# EAGLE board UV - SERVO_CTRL - Copy (3) (EAGLE 6.3)
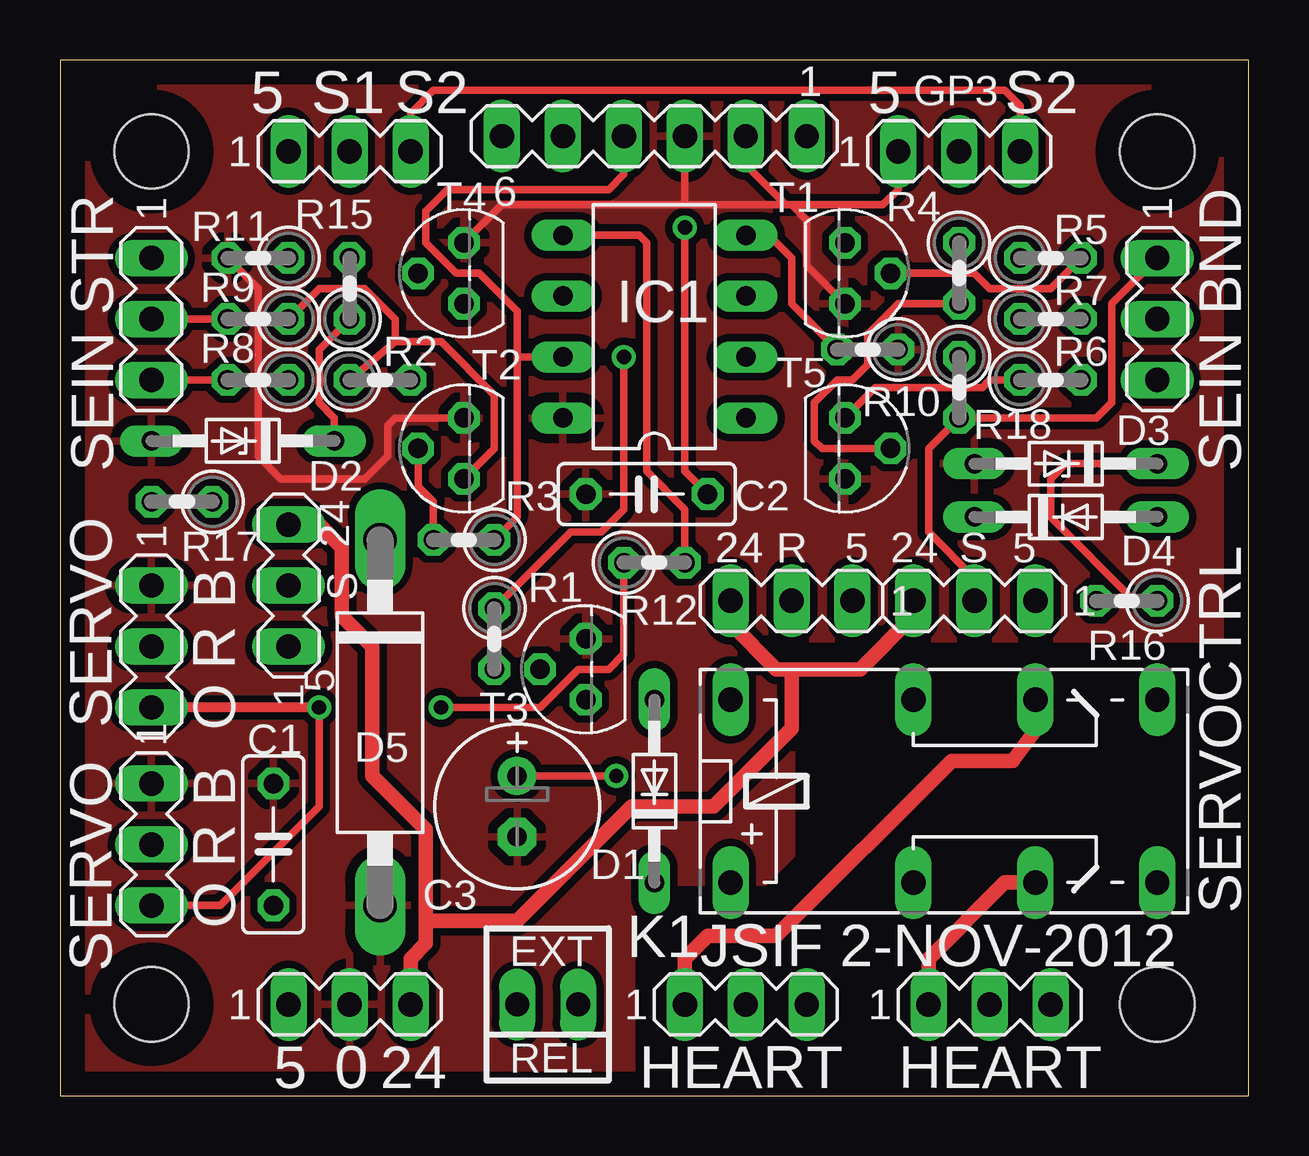
[diagram p0: board, top side]
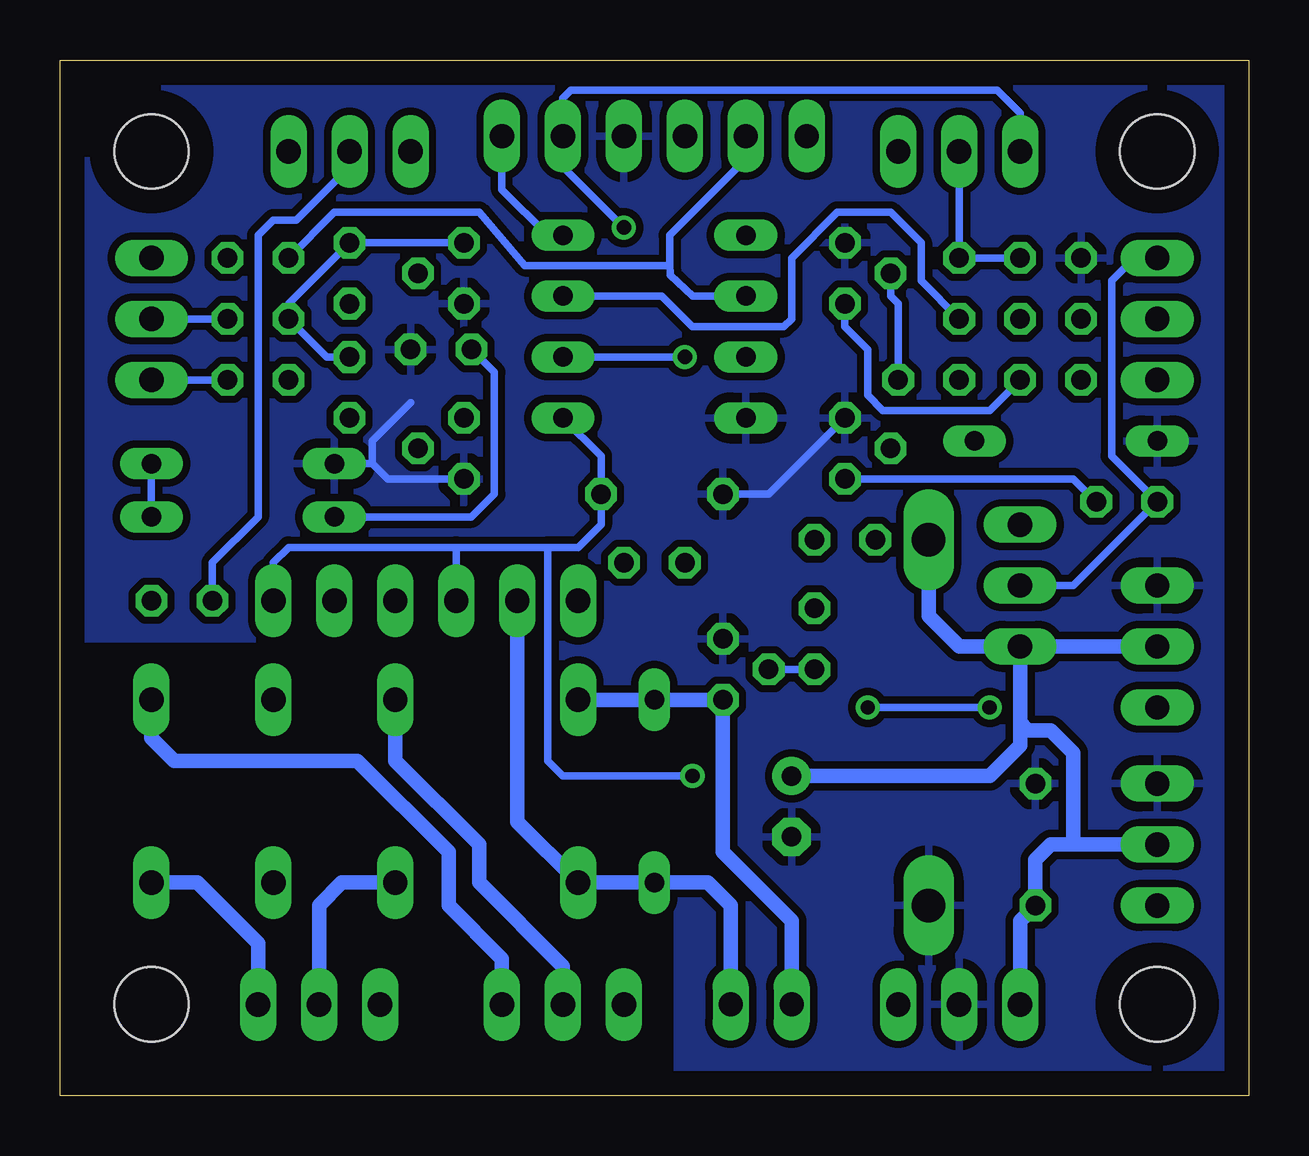
[diagram p1: board, bottom side, seen from below]

Size 49.53 x 43.18 mm. Coordinates in mm from the lower left corner, seen from the top.
Outline: 0,0 49.53,0 49.53,43.18 0,43.18 0,0
Copper layers (1*16): Top 0.035mm / dielectric 1.5mm / Bottom 0.035mm
Design rules "default *": minimum track width 10mil, minimum drill 20mil, track to track 8mil, track to pad 8mil, pad to pad 8mil, via to via 8mil, smd to smd 8mil, copper to edge 40mil, drill to drill 8mil, minimum pad ring 10mil, minimum via ring 8mil, stop-mask expansion 4mil, vias tented up to drill 0mil, thermal gap 16mil
Holes 3.1 mm at 3.81,3.81 45.72,3.81 3.81,39.37 45.72,39.37

## Footprints (pad centres in the part's own frame; a part is rotated, then mirrored left to right if it is on the bottom)
C050-025X075 = drill 0.813 octagon: 1 -2.54,0; 2 2.54,0
E2,5-7 = drill 0.813 pad 1.6: + -1.27,0 | drill 0.813 pad 1.6 octagon: - 1.27,0
DO34-7 = drill 0.813 long: A 3.81,0; C -3.81,0
DO34Z7 = drill 0.813 long: A 3.81,0; C -3.81,0
C1702-15 = drill 1.397 long: A 7.62,0; C -7.62,0
DIL8 = drill 0.813 long: 1 -3.81,-3.81; 2 -1.27,-3.81; 3 1.27,-3.81; 4 3.81,-3.81; 5 3.81,3.81; 6 1.27,3.81; 7 -1.27,3.81; 8 -3.81,3.81
G6A-234P = drill 1.016 long: 1 -3.81,-3.81; 16 -3.81,3.81; O1 8.89,-3.81; O2 8.89,3.81; P1 3.81,-3.81; P2 3.81,3.81; S1 13.97,-3.81; S2 13.97,3.81
0207/2V = drill 0.813 octagon: 1 -1.27,0; 2 1.27,0
MA03-1 = drill 1.016 long: 1 -2.54,0; 2 0,0; 3 2.54,0
MA06-1 = drill 1.016 long: 1 -6.35,0; 2 -3.81,0; 3 -1.27,0; 4 1.27,0; 5 3.81,0; 6 6.35,0
TO92 = drill 0.813 octagon: 1 1.27,0; 2 0,1.905; 3 -1.27,0
22-23-2021 = drill 1 long: 1 -1.27,0; 2 1.27,0

## Placement (x,y rotation side)
C1  220Nf  [C050-025X075]  8.89,10.48 90 top
C2  220nF  [C050-025X075]  24.45,25.08 180 top
C3  100uF  [E2,5-7]  19.05,12.06 270 top
D1  BAT85  [DO34-7]  24.77,12.7 90 top
D2  5V1  [DO34Z7]  7.62,27.3 180 top
D3  5V1  [DO34Z7]  41.91,26.35 180 top
D4  bat85  [DO34-7]  41.91,24.13 0 top
D5  5V6  [C1702-15]  13.34,15.56 270 top
IC1  PIC12F675P  [DIL8]  24.77,32.07 90 top
K1  G6A-234P  [G6A-234P]  31.75,12.7 0 top
R1  4K7  [0207/2V]  18.1,19.05 270 top
R2  4K7  [0207/2V]  13.34,29.84 0 top
R3  4K7  [0207/2V]  16.83,23.18 180 top
R4  4K7  [0207/2V]  37.47,34.29 270 top
R5  4K7  [0207/2V]  41.27,34.92 0 top
R6  150E  [0207/2V]  41.27,29.84 0 top
R7  150E  [0207/2V]  41.27,32.38 0 top
R8  150E  [0207/2V]  8.26,29.84 180 top
R9  150E  [0207/2V]  8.26,32.38 180 top
R10  1K  [0207/2V]  33.66,31.11 180 top
R11  1K  [0207/2V]  8.26,34.92 180 top
R12  220E  [0207/2V]  24.77,22.23 0 top
R15  1K  [0207/2V]  12.06,33.66 90 top
R16  1K  [0207/2V]  44.45,20.64 180 top
R17  10K  [0207/2V]  5.08,24.77 180 top
R18  10K  [0207/2V]  37.47,29.53 270 top
SV1  Supply  [MA03-1]  12.06,3.81 0 top
SV2  Switch_Input  [MA03-1]  12.06,39.37 0 top
SV3  Select_Jumper  [MA03-1]  37.47,39.37 0 top
SV4  ICSP  [MA06-1]  24.77,40.01 180 top
SV5  Sein_Straight  [MA03-1]  3.81,32.38 270 top
SV6  Sein_Straight  [MA03-1]  45.72,32.38 270 top
SV7  Servo_Out  [MA03-1]  3.81,10.48 270 top
SV8  Heart_Pol1  [MA03-1]  38.73,3.81 0 top
SV9  Heart_Pol2  [MA03-1]  28.57,3.81 0 top
SV10  Servo_Out2  [MA03-1]  3.81,18.73 270 top
SV11  Jumper  [MA03-1]  9.53,21.27 90 top
SV12  Jumper  [MA03-1]  38.1,20.64 180 top
SV13  Jumper  [MA03-1]  30.48,20.64 180 top
T1  BC547  [TO92]  32.7,34.29 270 top
T2  BC547  [TO92]  16.83,26.99 90 top
T3  BC547  [TO92]  21.91,17.78 90 top
T4  BC547  [TO92]  16.83,34.29 90 top
T5  BC547  [TO92]  32.7,26.99 270 top
X1  22-23-2021  [22-23-2021]  20.32,3.81 180 top

## Library data of the parts
C1-C3 R1-R12 R15-R18 = rcl
D1-D5 = diode
IC1 = microchip; MF: MICROCHIP; MPN: PIC12F675-E/P; OC_FARNELL: 9759018; OC_NEWARK: 92C4340
K1 = relay; OC_FARNELL: unknown; OC_NEWARK: unknown
SV1-SV13 = con-lstb; OC_FARNELL: unknown; OC_NEWARK: unknown
T1-T5 = transistor
X1 = con-molex; MF: MOLEX; MPN: 22-23-2021; OC_FARNELL: 1462926; OC_NEWARK: 25C3832

## Nets
0V: C1.2 C2.2 C3.- D2.A D3.A D5.A IC1.8 R10.1 R11.2 SV1.2 SV4.3 SV7.1 SV10.1 T1.1 T2.1 T3.1 T4.1 T5.1
+5V: C1.1 C2.1 C3.+ D5.C IC1.1 SV1.1 SV2.1 SV3.1 SV4.2 SV7.2 SV10.2 SV11.1 SV12.1 SV13.1
+24V: SV1.3 SV11.3 SV12.3 SV13.3
HEART_POL: IC1.2 R1.1
ICSPCLK: IC1.6 R5.1 SV4.5
ICSPDAT: IC1.7 R3.1 SV4.4
N$1: D2.C IC1.3 R15.1
N$2: K1.O1 SV8.1
N$3: SV2.3 SV3.3
N$4: K1.S1 SV8.3
N$5: K1.P1 SV8.2
N$6: K1.O2 SV9.1
N$7: K1.S2 SV9.3
N$8: K1.P2 SV9.2
N$9: IC1.5 R12.2
N$10: R1.2 T3.2
N$11: D1.C K1.1 SV13.2 X1.1
N$12: D1.A K1.16 T3.3 X1.2
N$13: R4.2 T5.2
N$14: R6.1 T5.3
N$15: R6.2 SV6.3
N$16: R5.2 T1.2
N$17: R11.1 R15.2 SV2.2
N$18: R4.1 R7.1 R18.1 T1.3
N$19: R7.2 SV6.2
N$20: R2.2 T4.2
N$21: R8.1 T4.3
N$22: R8.2 SV5.3
N$23: R9.2 SV5.2
N$24: R2.1 R9.1 R17.1 T2.3
N$25: R3.2 T2.2
N$26: D3.C D4.A R16.1
N$27: R17.2 SV5.1 SV11.2
N$28: R18.2 SV6.1 SV12.2
N$29: R16.2 SV3.2
SERVO_OUT: R12.1 SV7.3 SV10.3
VPP: D4.C IC1.4 R10.2 SV4.1

## Tracks (layer width: path | path; a pad name or v marks a point on that pad's centre or on a via)
0V
  Top 0.305: SV4.3 26.04,37.15 | 26.04,37.15 18.41,37.15 T4.1 | 26.04,37.15 30.48,37.15 31.11,36.51 31.11,34.61 T1.1 | R11.2 8.26,33.66 8.26,26.67 9.21,25.72 12.7,25.72 13.65,26.67 13.65,27.94 13.97,28.26 T2.1
  Bottom 0.305: T5.1 35.88,25.72 36.51,26.35 | 36.51,26.35 D3.A | 34.92,28.89 36.51,27.3 36.51,26.35 | T1.1 33.02,33.02 | T2.1 20,25.08 C2.2
  pour Bottom (isolate 0.305): 0,0 0,43.18 49.53,43.18 49.53,19.05 30.48,19.05 30.48,9.89 29.48,8.89 23.81,8.89 23.81,0
  pour Top (isolate 0.305): 0,0 0,43.18 49.53,43.18 49.53,19.05 30.48,19.05 30.48,10.03 29.34,8.89 23.81,8.89 23.81,0
+5V  (via drill 0.6)
  Top 0.305: v23.18,13.34 C3.+ | SV4.2 28.57,38.81 30.24,37.15 34.29,37.15 34.92,37.78 SV3.1 | v26.04,36.2 26.04,26.04 C2.1
  Bottom 0.305: IC1.1 26.99,26.67 C2.1 26.99,23.81 27.94,22.86 29.21,22.86 | 29.21,22.86 29.21,13.97 28.57,13.34 v23.18,13.34 | SV13.1 33.02,22.86 | 33.02,22.86 29.21,22.86 | SV12.1 40.64,22.23 40.01,22.86 33.02,22.86 | v26.04,36.2 28.57,38.73 SV4.2 28.57,41.59 28.26,41.91 10.48,41.91 9.53,40.96 SV2.1
  Bottom 0.61: SV1.1 9.53,7.3 C1.1 8.89,9.84 8.26,10.48 7.3,10.48 | SV7.2 7.3,10.48 | SV11.1 SV10.2 | C3.+ 10.79,13.34 9.53,14.61 9.53,15.56 | SV11.1 9.53,15.56 | 7.3,10.48 7.3,14.29 8.26,15.24 9.21,15.24 9.53,15.56 | SV11.1 12.06,18.73 13.34,20 D5.C
+24V
  Top 0.61: SV11.3 10.79,23.81 11.75,22.86 11.75,20 13.02,18.73 13.02,13.34 15.24,11.11 15.24,7.3 | 15.24,7.3 15.24,6.35 14.61,5.71 SV1.3 | 15.24,7.3 19.05,7.3 23.81,12.06 27.24,12.06 30.48,15.31 30.48,17.78 | SV12.3 35.56,20 33.34,17.78 30.48,17.78 | SV13.3 27.94,19.68 29.84,17.78 30.48,17.78
HEART_POL  (via drill 0.6)
  Top 0.305: R1.1 21.27,23.5 22.54,23.5 23.5,24.45 v23.5,30.8
  Bottom 0.305: v23.5,30.8 IC1.2
ICSPCLK
  Bottom 0.305: R5.1 38.1,36.83 32.07,36.83 30.16,34.61 24.13,34.61 24.13,34.68 | 24.13,34.68 24.1,34.22 23.17,33.34 IC1.6 | SV4.5 20.95,39.05 24.13,35.88 24.13,34.68
ICSPDAT
  Top 0.305: SV4.4 23.5,38.42 22.86,37.78 16.14,37.78 15.24,36.88 15.24,35.56 16.51,34.29 17.46,34.29 19.05,32.7 19.05,30.8 | 19.05,30.8 19.05,24.13 R3.1 | IC1.7 19.05,30.8
N$1
  Top 0.305: D2.C 11.43,28.26 10.79,28.89 10.79,31.11 R15.1
  Bottom 0.305: IC1.3 24.45,33.34 23.18,32.07 19.37,32.07 19.05,32.38 19.05,34.92 17.14,36.83 14.92,36.83 13.65,35.56 13.65,33.97 R15.1
N$2
  Top 0.61: SV8.1 36.2,5.71 39.37,8.89 K1.O1
N$3
  Top 0.305: SV2.3 14.61,40.96 15.56,41.91 39.37,41.91 40.01,41.27 SV3.3
N$4
  Bottom 0.61: K1.S1 43.81,8.89 41.27,6.35 SV8.3
N$5
  Bottom 0.61: K1.P1 37.78,8.89 38.73,7.94 SV8.2
N$6
  Top 0.61: SV9.1 26.04,5.71 26.99,6.67 29.84,6.67 37.15,13.97 39.69,13.97 40.64,15.24 K1.O2
N$7
  Bottom 0.61: SV9.3 31.11,5.71 33.34,7.94 33.34,10.16 37.15,13.97 44.77,13.97 45.72,14.92 K1.S2
N$8
  Bottom 0.61: SV9.2 28.57,5.4 32.07,8.89 32.07,10.48 35.56,13.97 K1.P2
N$9
  Top 0.305: R12.2 26.04,24.45 24.45,26.04 24.45,35.56 24.13,35.88 IC1.5
N$10
  Bottom 0.305: T3.2 R1.2
N$11
  Bottom 0.61: X1.1 21.59,7.94 22.54,8.89 D1.C K1.1 30.48,11.43 SV13.2
N$12
  Bottom 0.61: X1.2 19.05,7.3 21.91,10.16 T3.3 D1.A K1.16
N$13
  Top 0.305: T5.2 31.75,26.99 31.43,27.3 31.43,28.89 32.38,29.84 33.02,29.84 33.66,30.48 33.66,31.75 34.92,33.02 R4.2
N$14
  Top 0.305: R6.1 38.73,29.84 38.42,29.53 33.97,29.53 T5.3
N$15
  Bottom 0.305: R6.2 SV6.3
N$16
  Top 0.305: T1.2 38.1,34.29 38.73,33.66 41.27,33.66 R5.2
N$17
  Bottom 0.305: SV2.2 R15.2 R11.1
N$18
  Bottom 0.305: R18.1 38.42,30.8 R7.1 40.01,33.02 R4.1 T1.3
N$19
  Bottom 0.305: R7.2 SV6.2
N$20
  Bottom 0.305: R2.2 14.61,33.02 14.92,33.34 T4.2
N$21
  Bottom 0.305: T4.3 16.83,32.07 15.88,31.11 15.88,29.21 15.24,28.57 10.79,28.57 R8.1
N$22
  Top 0.305: R8.2 SV5.3
N$23
  Top 0.305: R9.2 SV5.2
N$24
  Top 0.305: T2.3 18.1,26.99 18.1,29.21 15.88,31.43 13.97,31.43 | 13.97,31.43 13.97,32.38 12.7,33.66 10.79,33.66 R9.1 | R2.1 13.97,31.43
  Bottom 0.305: R17.1 7.3,25.72 T2.3
N$25
  Top 0.305: R3.2 15.56,24.77 14.92,25.4 T2.2
N$26
  Top 0.305: R16.1 44.77,20.64 41.27,24.13 41.27,25.72 41.91,26.35 D3.C
  Bottom 0.305: D3.C D4.A
N$27
  Bottom 0.305: SV11.2 7.3,21.27 R17.2 5.71,26.67 5.71,33.97 4.76,34.92 SV5.1
N$28
  Top 0.305: SV12.2 38.1,21.59 36.2,23.5 36.2,26.99 R18.2 43.18,28.26 43.81,28.89 43.81,33.02 SV6.1
N$29
  Bottom 0.305: SV3.2 37.47,38.73 39.69,36.51 40.64,36.51 41.27,35.88 41.27,24.13 43.18,22.23 R16.2
SERVO_OUT  (via drill 0.6)
  Top 0.305: SV7.3 6.67,7.94 10.79,12.06 v10.79,16.19 | v15.88,16.19 20,16.19 21.59,17.78 22.86,17.78 23.5,18.41 R12.1
  Top 0.406: v10.79,16.19 SV10.3
  Bottom 0.305: v10.79,16.19 v15.88,16.19
VPP
  Top 0.305: R10.2 30.48,33.02 30.48,34.92 29.53,35.88 IC1.4
  Bottom 0.305: D4.C 32.38,24.13 31.43,25.08 31.43,30.16 R10.2 | IC1.4 29.21,35.88 31.11,37.78 SV4.1

## Text on the board
tNames: 5 | S1 | S2 | 5 | GP3 | S2 | SEIN STR | SEIN BND | SERVO | 24 | 24 | 24 | R | 5 | 24 | S | 5 | S | B | R | 5 | O | SERVO | B | R | SERVOCTRL | O | EXT | JSIF 2-NOV-2012 | REL | 5 | 0 | 24 | HEART | HEART